# Altium PCB PCB1.PcbDoc
Units mm, origin at the board's own origin, x right, y up, seen from the top; angles counter-clockwise.
Board outline 45.85 x 46.69 mm, 6 copper layers (Top Layer 1, Layer 2, Layer 3, Layer 4, Layer 5, Bottom Layer 1), stack 0.816 mm thick; 33 components, 21 nets, 102 pads, 79 vias.
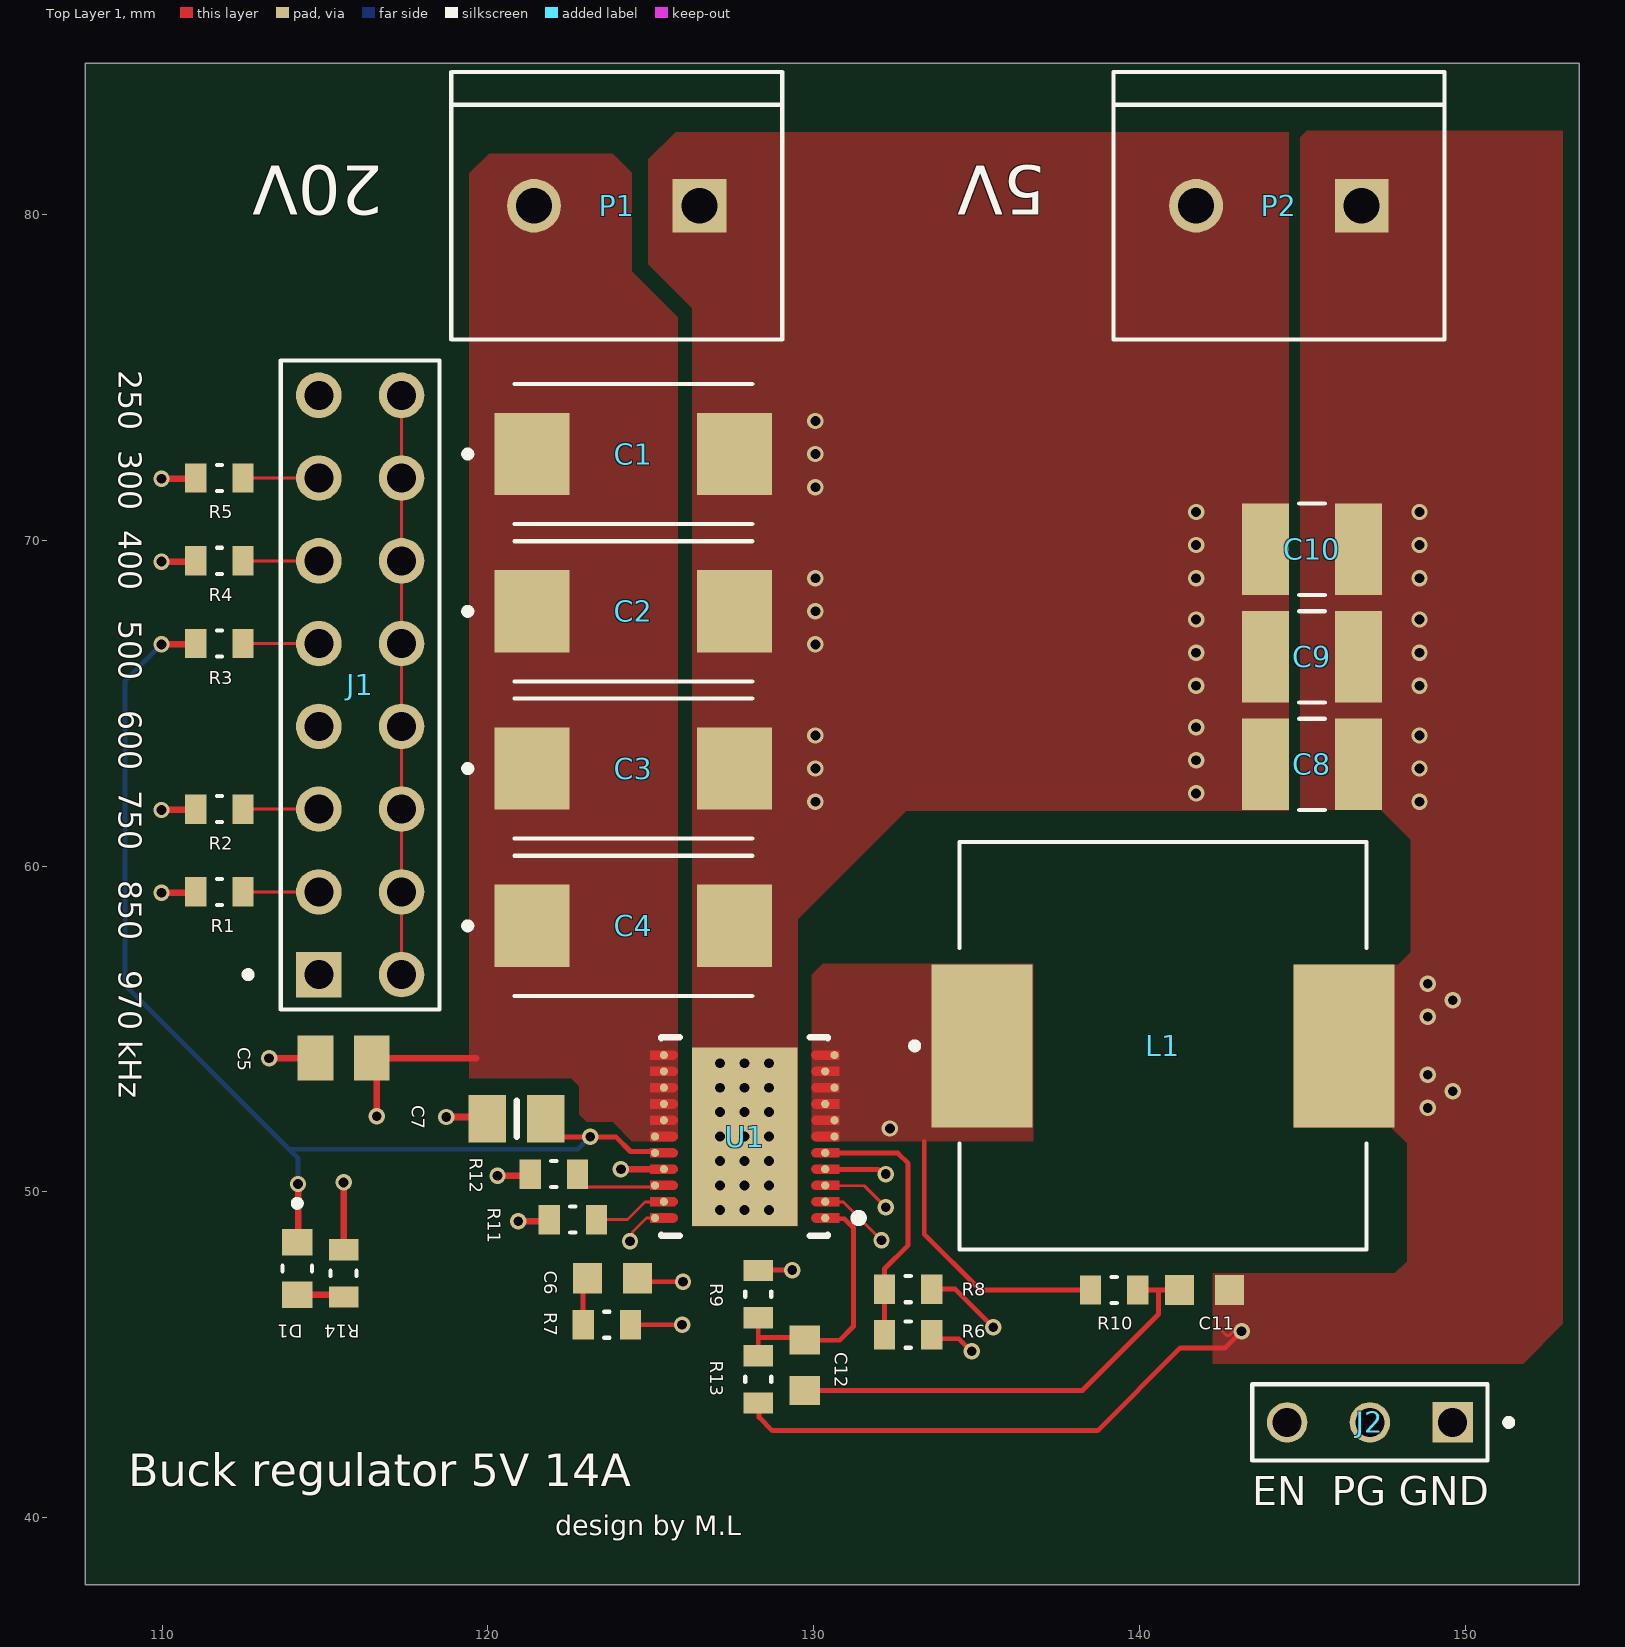
[diagram p0: Top Layer 1 view]
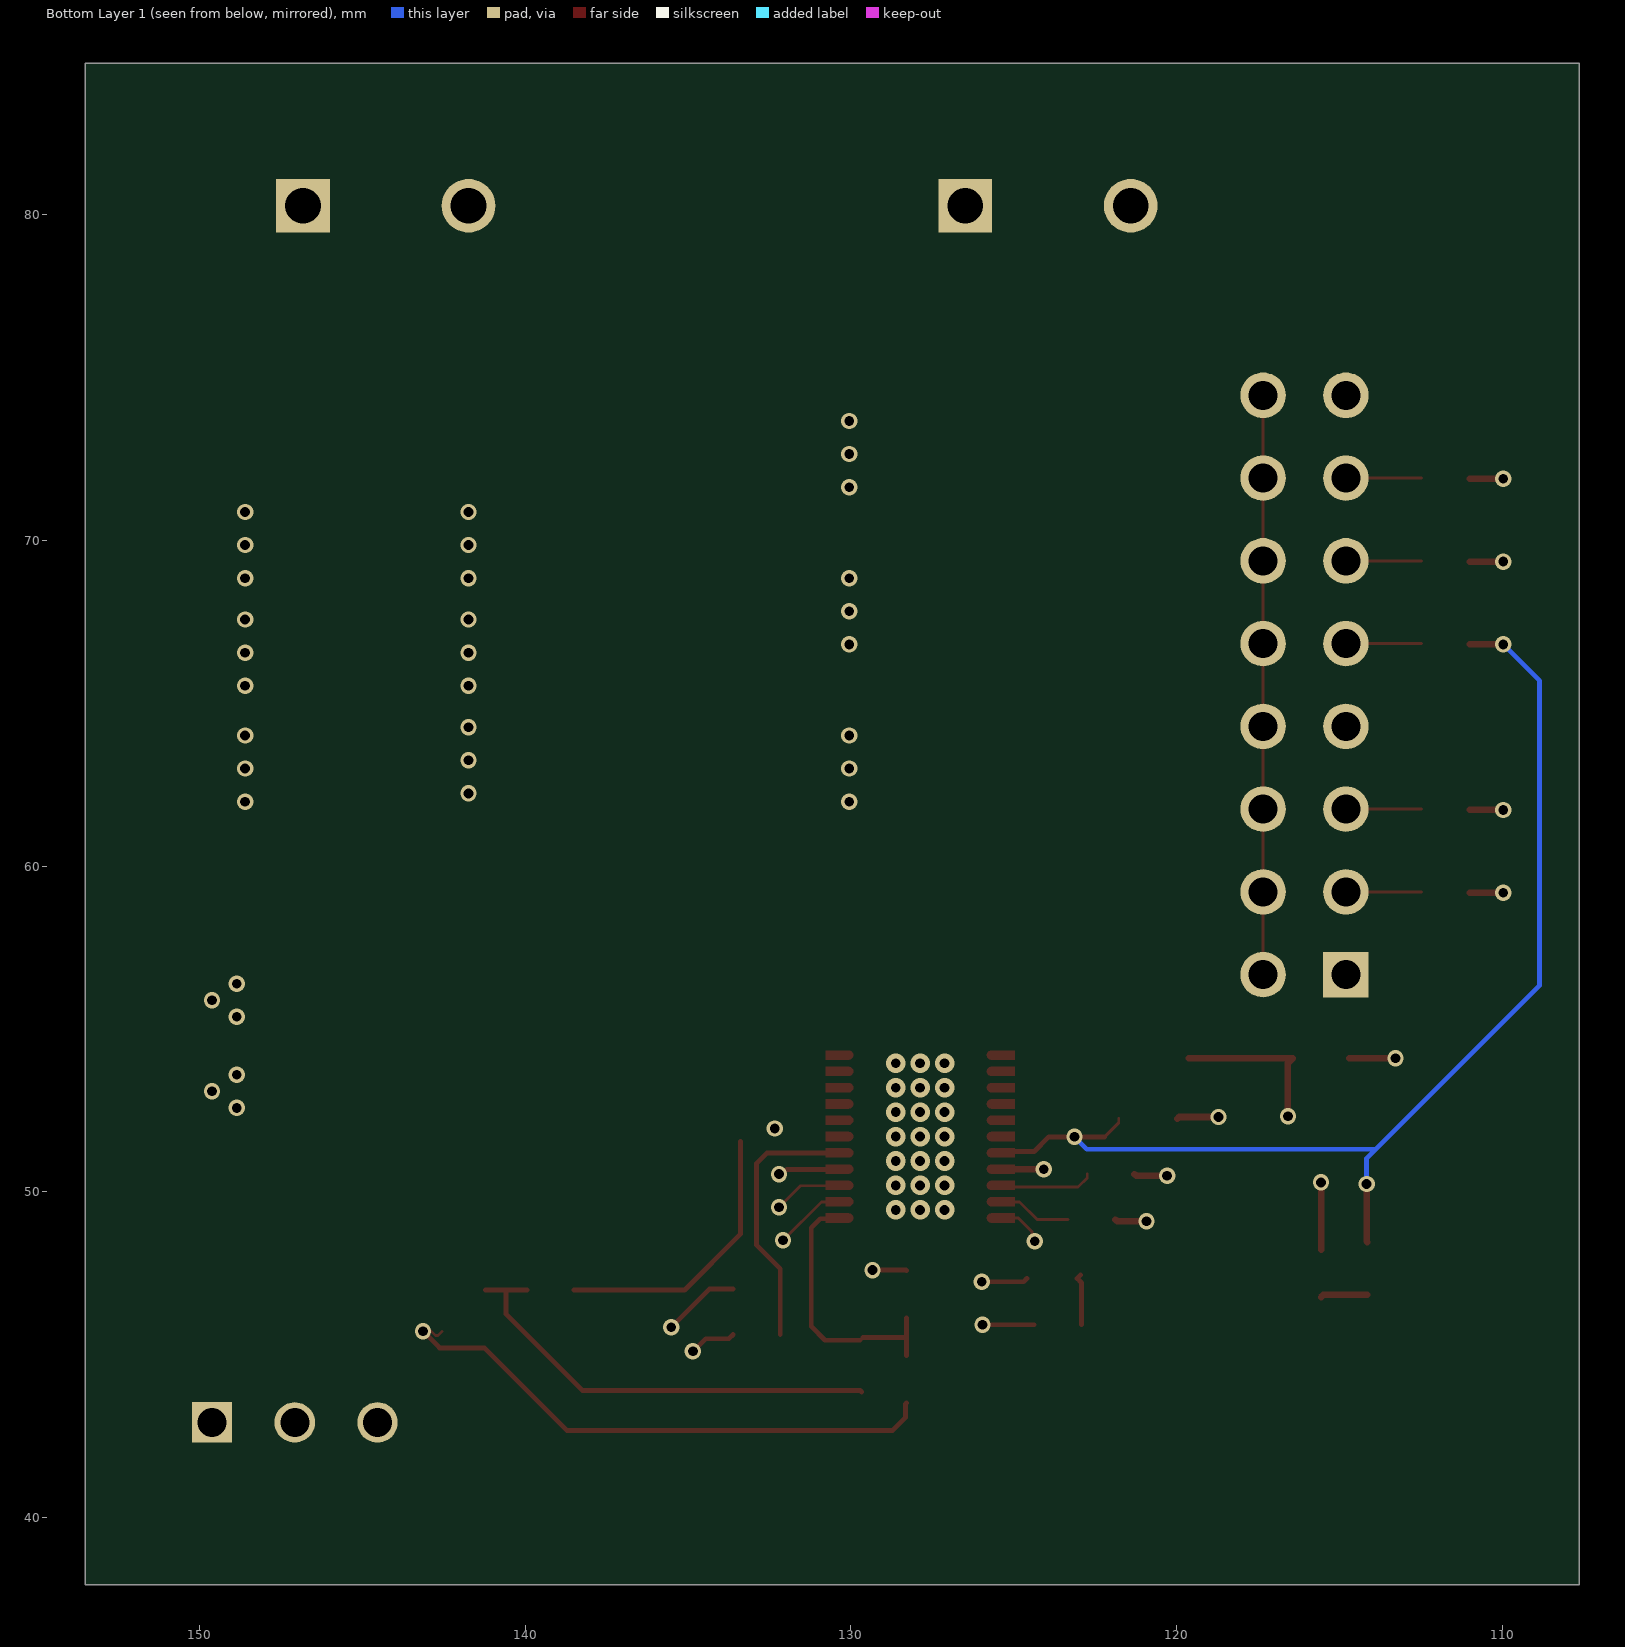
[diagram p1: Bottom Layer 1 view, seen from below]
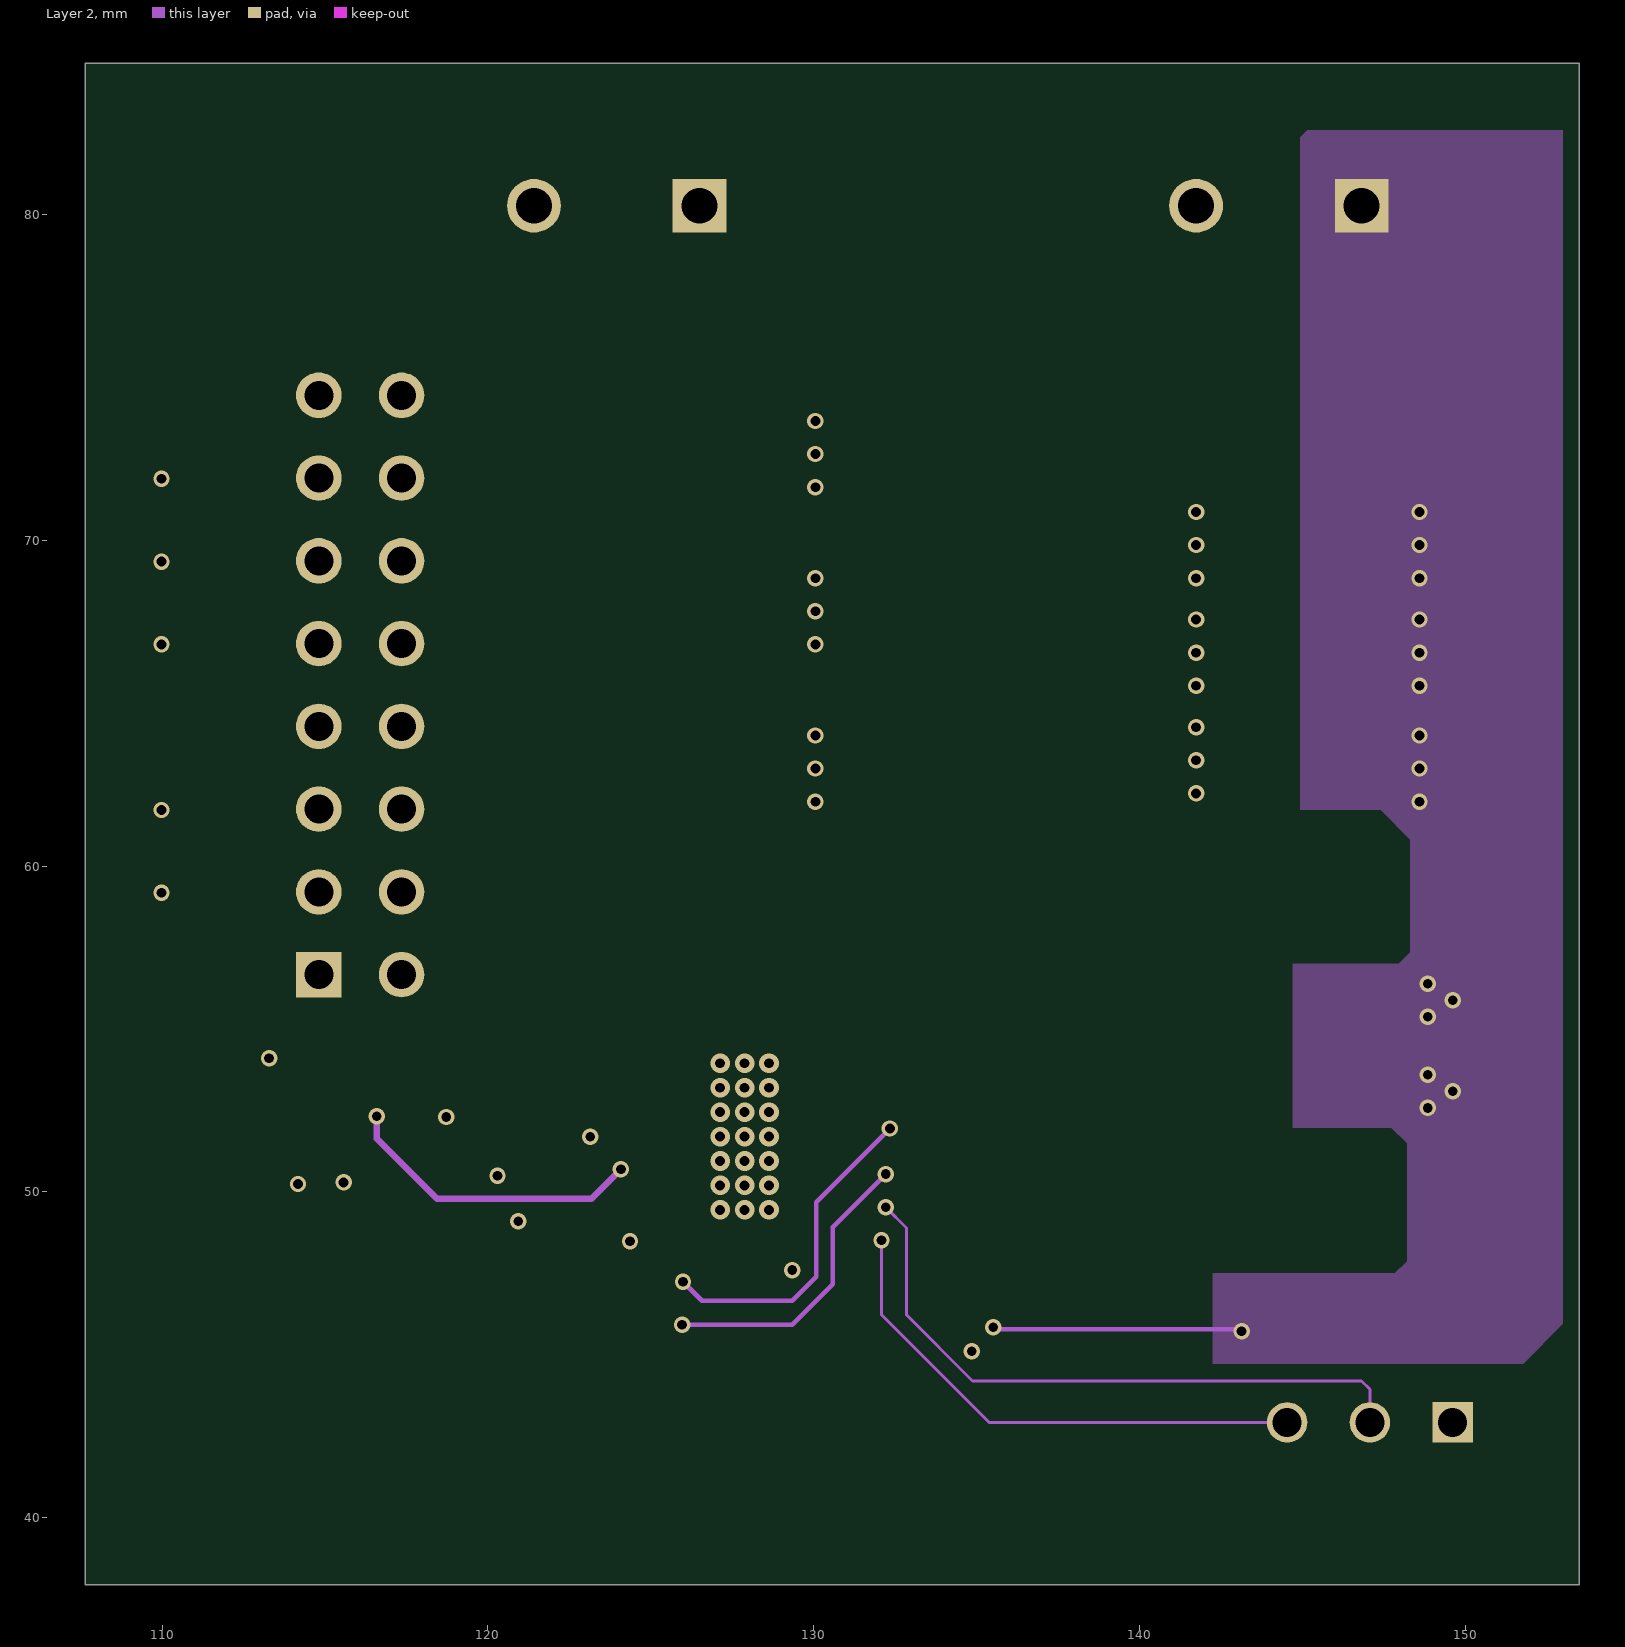
[diagram p2: Layer 2]
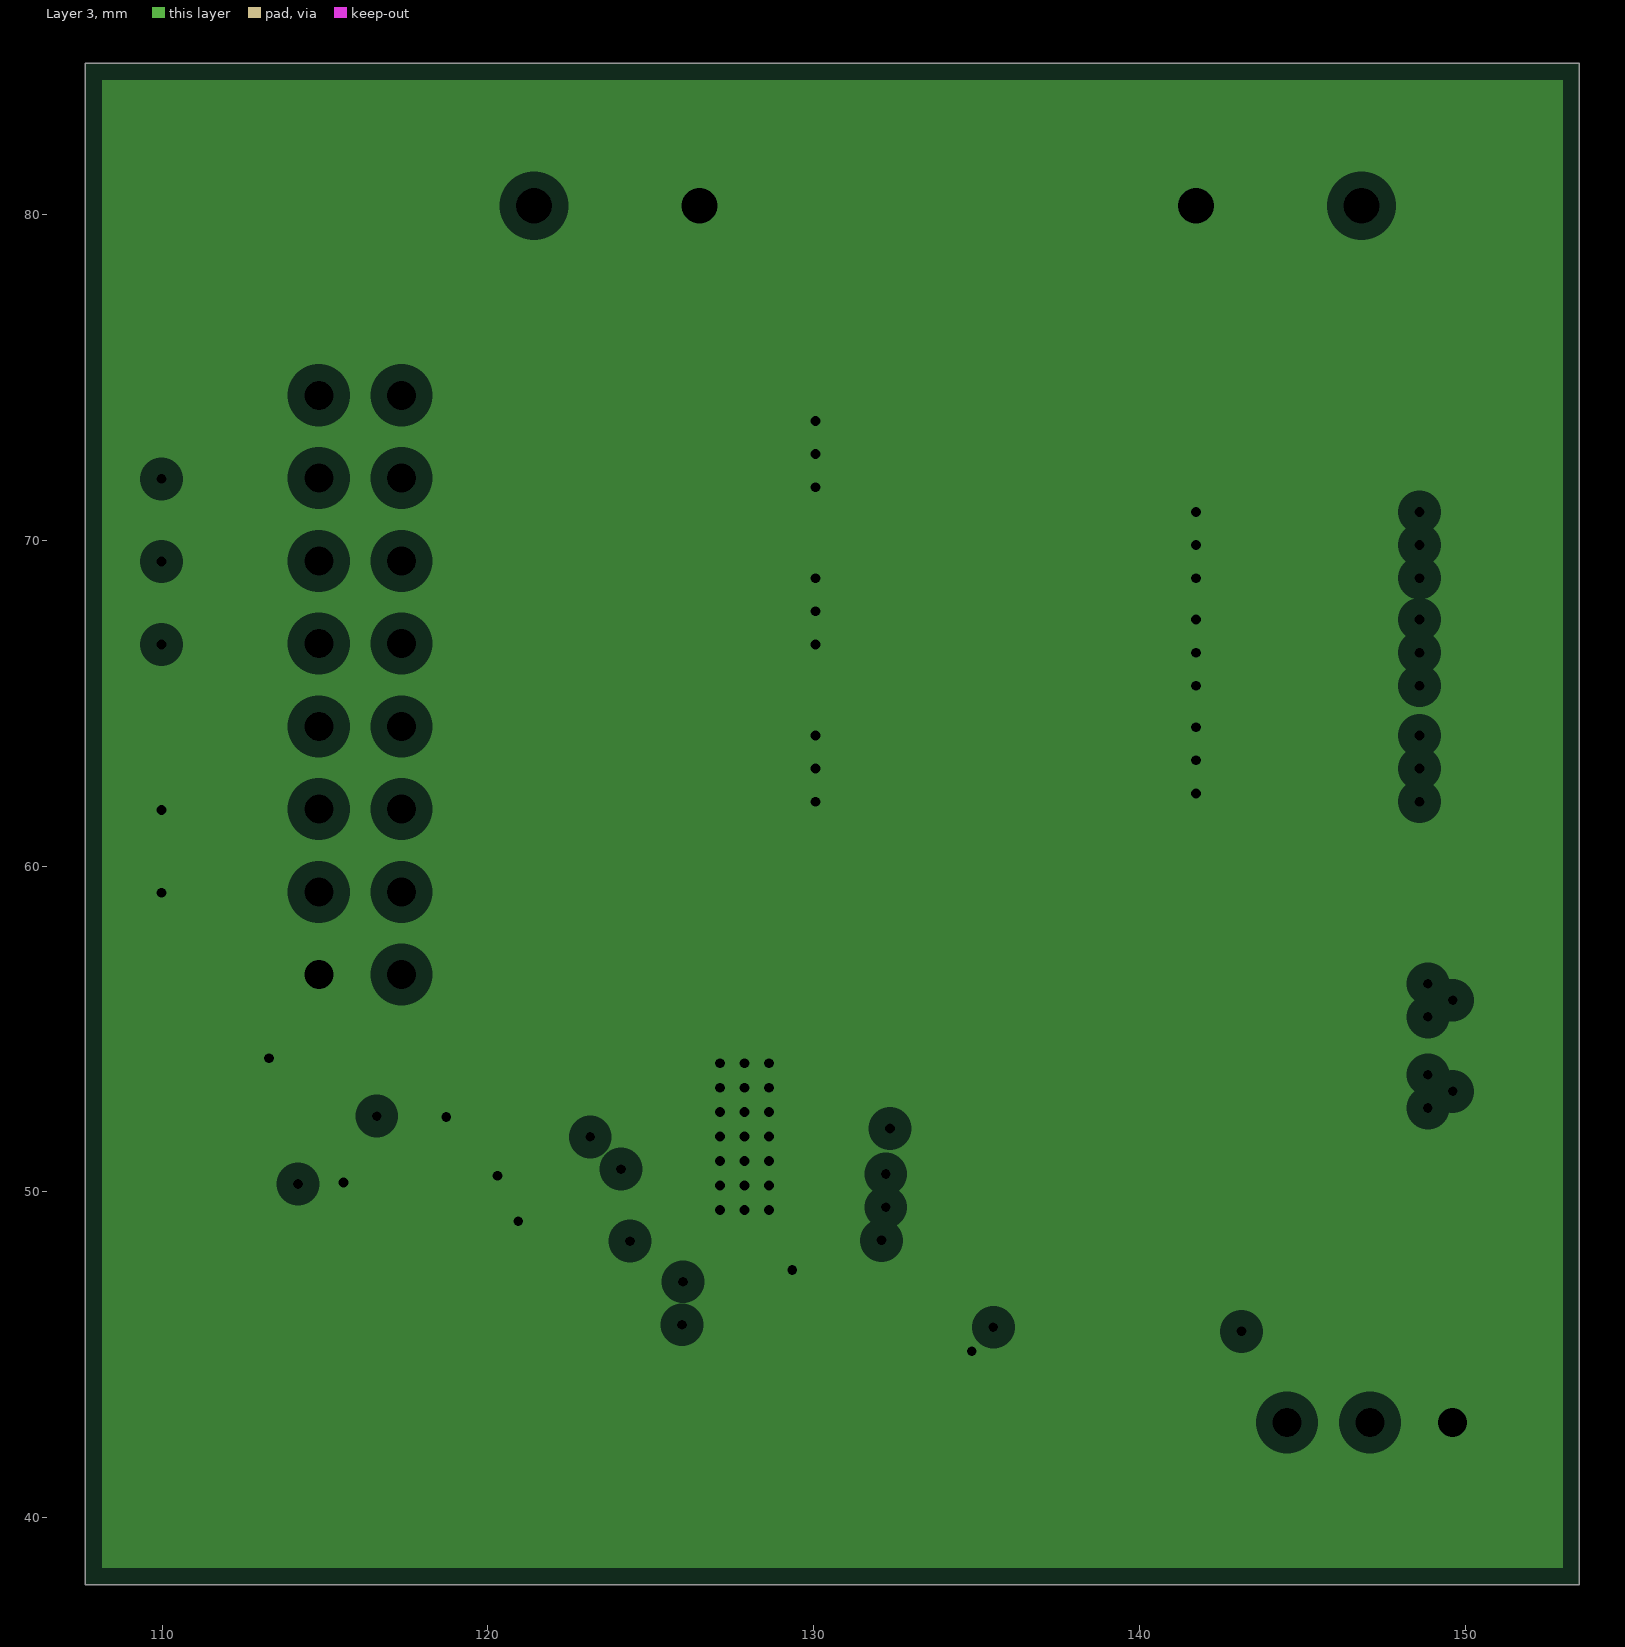
[diagram p3: Layer 3, clearances drawn from the general rule]
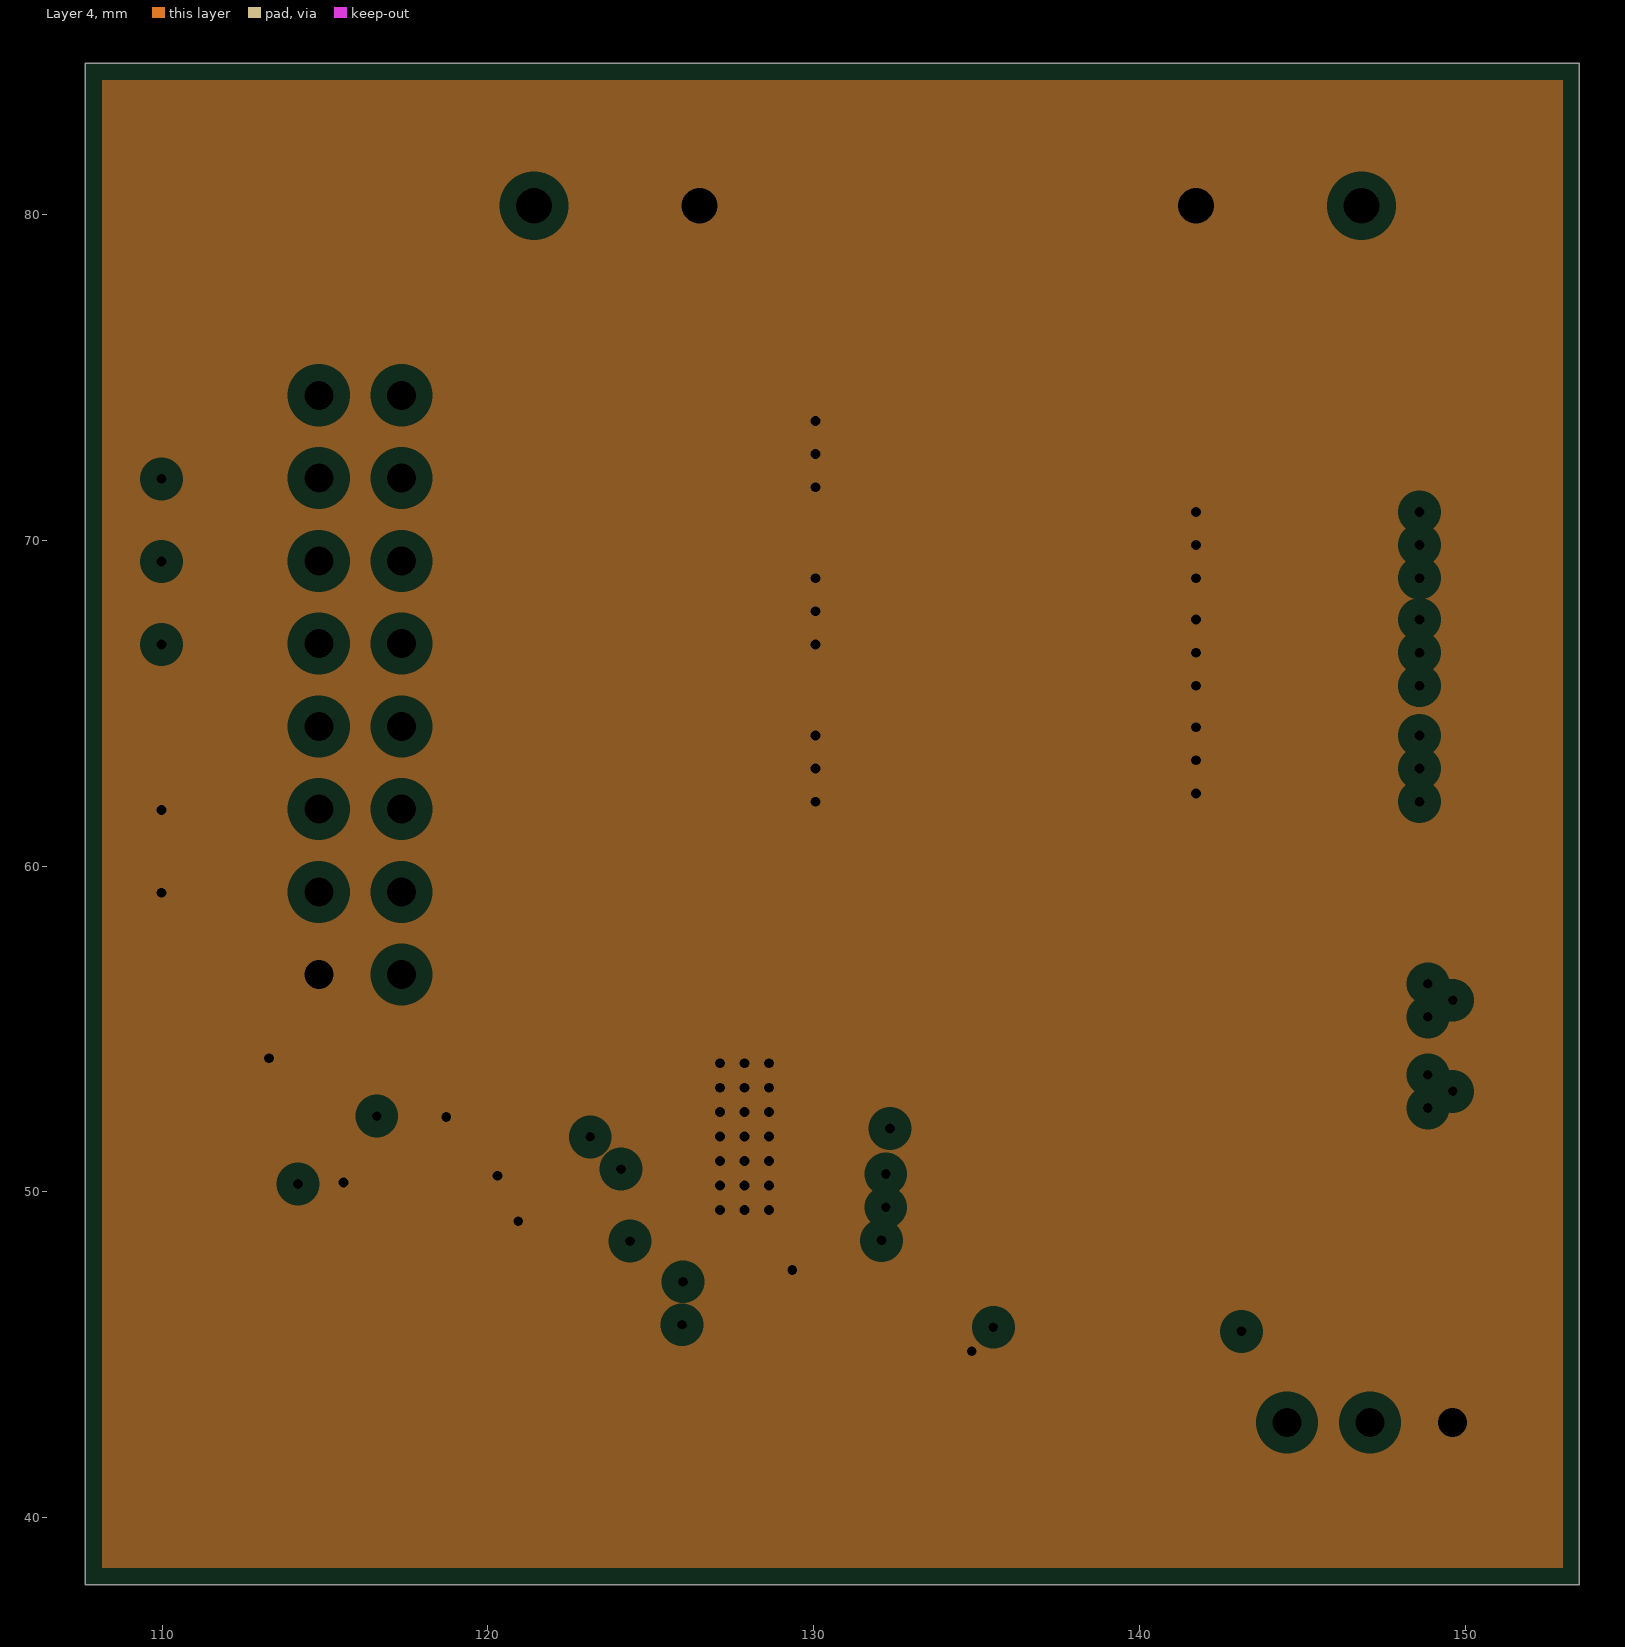
[diagram p4: Layer 4, clearances drawn from the general rule]
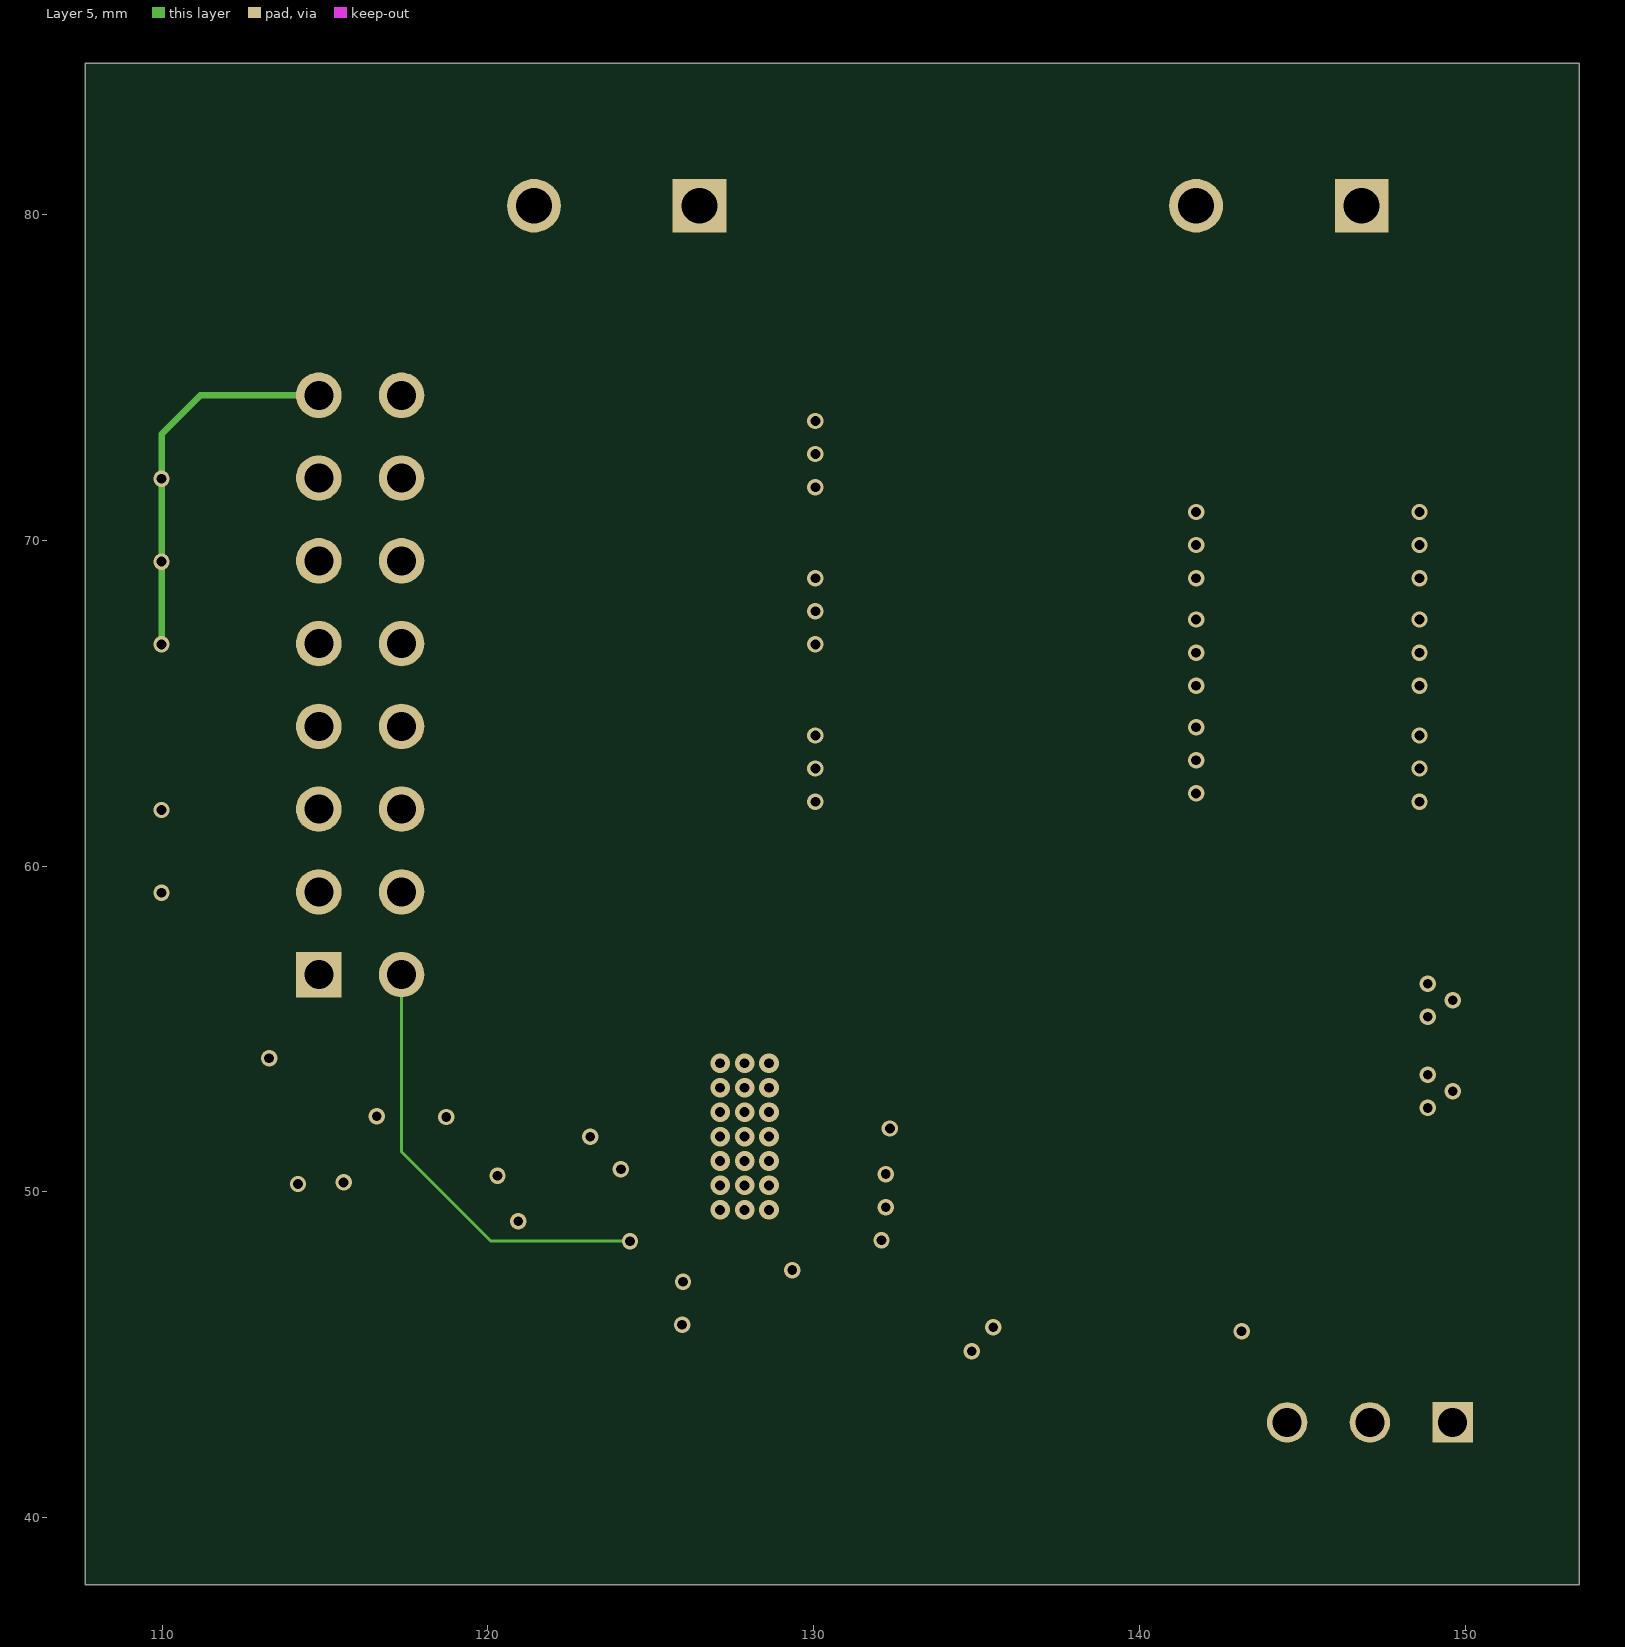
[diagram p5: Layer 5]
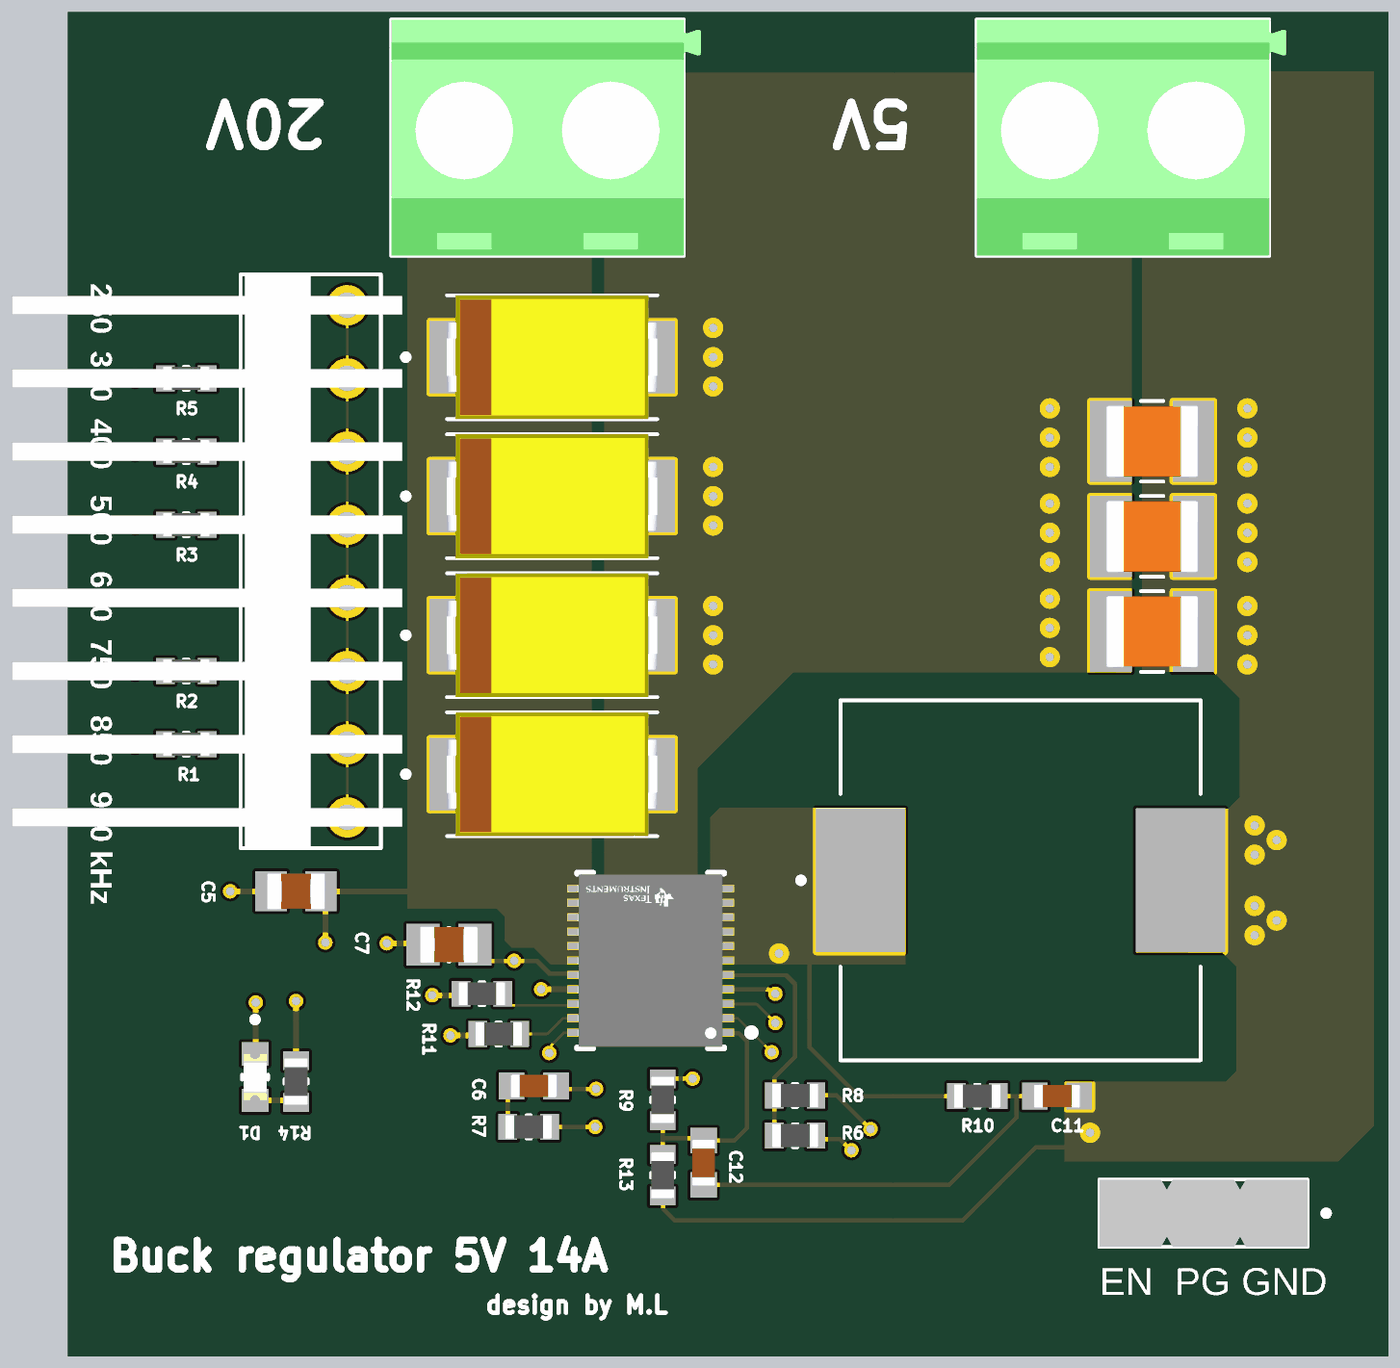
[diagram p6: 3D render of the assembled board from above, using the file's embedded part models]

## Layer stack, top to bottom
Top Solder: solder mask 0.0102, Solder Resist, Dk 3.5
Top Layer 1: signal copper 0.035
Dielectric 2: prepreg 0.0711, PP-006, Dk 4.1
Layer 2: signal copper 0.035
Dielectric 4: prepreg 0.0711, PP-006, Dk 4.1
Layer 3: plane copper 0.0356, net GND
Dielectric 1: dielectric 0.32, FR-4, Dk 4.8
Layer 4: plane copper 0.0356, net GND
Dielectric 5: prepreg 0.0711, PP-006, Dk 4.1
Layer 5: signal copper 0.035
Dielectric 3: prepreg 0.0711, PP-006, Dk 4.1
Bottom Layer 1: signal copper 0.035
Bottom Solder: solder mask 0.0102, Solder Resist, Dk 3.5

## Board outline
107.645,37.948 153.492,37.948 153.492,84.633 107.645,84.633

## Design rules (kind name [scope] priority, off if disabled: settings)
Clearance Clearance_2_1 [(ExistsOnLayer('Layer 2') Or ExistsOnLayer('Layer 5')) vs (ExistsOnLayer('Layer 2') Or ExistsOnLayer('Layer 5'))] p1: gap=0.1 ignorepadtopadclearanceinfootprint=FALSE sourcerule=36 cellrowname=All cellrowtype=0 cellcolname=All cellcoltype=0 innerlayers=TRUE
Clearance Clearance_2_2 [(ExistsOnLayer('Top Layer 1') Or ExistsOnLayer('Bottom Layer 1')) vs (ExistsOnLayer('Top Layer 1') Or ExistsOnLayer('Bottom Layer 1'))] p2: gap=0.1 ignorepadtopadclearanceinfootprint=FALSE sourcerule=36 cellrowname=All cellrowtype=0 cellcolname=All cellcoltype=0 outerlayers=TRUE
Clearance Clearance_2 [All] p3: gap=0.254 ignorepadtopadclearanceinfootprint=FALSE except(0: Arc-Hole Track-Hole SMDPad-Hole THPad-Hole Via-Hole Fill-Hole Poly-Hole Region-Hole Text-Hole Hole-Hole; 0.09: Arc-Arc Arc-Track Arc-Text Track-Track Track-Text Text-Text; 0.127: SMDPad-SMDPad; 0.33: Arc-THPad Track-THPad THPad-Text; 0.5: THPad-THPad) ismatrix=TRUE
PlaneClearance [All] p1: clearance=0.508
PlaneConnect [All] p1: planeconnectstyle=Direct reliefexpansion=0.508 reliefentries=4 reliefconductorwidth=0.254 reliefairgap=0.254
PolygonConnect [All] p1: connectstyle=Relief reliefconductorwidth=0.254 reliefentries=4 polygonreliefangle="90 Angle" airgapwidth=0.254
RoutingVias RoutingViaStyle_1 [All] p1: holewidth=0.3 width=0.4 viastyle="Through Hole" minholewidth=0.3 minwidth=0.4 maxholewidth=0.711 maxwidth=1.27
SolderMaskExpansion [All] p1: expansion=0.102 istentingtop=FALSE
Width MaxMinWidth_1 [All] p1: maxlimit=5 minlimit=0.09 preferedwidth=0.254 minimp=50.000000 maximp=50.000000 favimp=50.000000
28 further rules are at their usual default settings.

## Components (designator, comment, footprint, x,y, rotation, side; value= is the part's Value field where it differs from the comment)
C1 "TCJD226M035R0070" CAPPM7343X310N 124.46,72.644 r0 top
C2 "TCJD226M035R0070" CAPPM7343X310N 124.46,67.818 r0 top
C3 "TCJD226M035R0070" CAPPM7343X310N 124.46,62.992 r0 top
C4 "TCJD226M035R0070" CAPPM7343X310N 124.46,58.166 r0 top
C5 "CL21A475KLCLQNC" CAPC2012X135N 115.57,54.102 r0 top
C6 "CL10B104KB8NNNC" CAPC1608X90N 123.825,47.346 r180 top
C7 "CL21B105KBFNNNE" CAPC2012X140N 120.879,52.248 r0 top
C8 "CL32A107MPVNNNE" ANTC3225X280N 145.288,63.119 r180 top
C9 "CL32A107MPVNNNE" ANTC3225X280N 145.288,66.421 r180 top
C10 "CL32A107MPVNNNE" ANTC3225X280N 145.288,69.723 r180 top
C11 "CL10B104KB8NNNC" CAPC1608X90N 141.986,46.99 r180 top
C12 "CL10C102JB8NNNC" CAPC1608X90N 129.718,44.679 r90 top
D1 "LTST-C190GKT" LEDC1608X35N 114.148,47.65 r270 top
J1 "87227-8" TE_87227-8 116.078,65.557 r90 top
J2 "5-146285-3" TE_5-146285-3 149.606,42.926 r180 top
L1 "SRP1265A-2R2M" IND_SRP1265A-330M 140.716,54.483 r0 top
P1 "282837-2" TE_282837-2 123.952,80.264 r180 top
P2 "282837-2" TE_282837-2 144.272,80.264 r180 top
R1 "ERJ3EKF4750V" RES_ERJ3EKF4750V 111.76,59.207 r0 top
R2 "ERJ3EKF4750V" RES_ERJ3EKF4750V 111.76,61.747 r0 top
R3 "ERJ3EKF4750V" RES_ERJ3EKF4750V 111.76,66.827 r0 top
R4 "ERJ3EKF4750V" RES_ERJ3EKF4750V 111.76,69.367 r0 top
R5 "ERJ3EKF4750V" RES_ERJ3EKF4750V 111.76,71.907 r0 top
R6 "ERJ3EKF4750V" RES_ERJ3EKF4750V 132.893,45.618 r0 top
R7 "ERJ-3GEY0R00V" RES_ERJ-3GEY0R00V 123.647,45.923 r180 top
R8 "ERJ3EKF4750V" RES_ERJ3EKF4750V 132.893,47.015 r180 top
R9 "ERJ3EKF4750V" RES_ERJ3EKF4750V 128.295,46.863 r90 top
R10 "ERJ-3GEY0R00V" RES_ERJ-3GEY0R00V 139.217,46.99 r0 top
R11 "ERJ3EKF4750V" RES_ERJ3EKF4750V 122.606,49.149 r180 top
R12 "ERJ3EKF4750V" RES_ERJ3EKF4750V 122.022,50.546 r0 top
R13 "ERJ3EKF4750V" RES_ERJ3EKF4750V 128.295,44.247 r270 top
R14 "ERJ3EKF4750V" RES_ERJ3EKF4750V 115.57,47.498 r270 top
U1 "TPS53319DQPR" FP-DQP0022A-MFG 127.875,51.698 r180 top

## Footprints (in the part's own frame and the unit in brackets; to place one, negate y for a bottom-side part, rotate by r counter-clockwise, add the part's x,y. Pads: shape width x height; smd on the part's side, far side on the other; paste and mask are expansions set on the pad)
ANTC3225X280N [mm]
  rect 1.45x2.81 smd: 1(-1.43,0) 2(1.43,0)
  silkscreen extent -0.39,-1.4 0.39,1.4, body extent -1.6,-1.25 1.6,1.25, height 2.8
CAPC1608X90N [mm]
  rect 0.89x0.93 smd: 1(-0.77,0) 2(0.77,0)
  body extent -0.8,-0.4 0.8,0.4, height 0.45
CAPC2012X135N [mm]
  rect 1.1x1.38 smd: 1(-0.863,0) 2(0.863,0)
  body extent -1,-0.63 1,0.63, height 1.35
CAPC2012X140N [mm]
  rect 1.15x1.45 smd: 1(-0.9,0) 2(0.9,0)
  silkscreen extent 0,-0.55 0,0.55, body extent -1,-0.63 1,0.63, height 1.35
CAPPM7343X310N [mm]
  rect 2.3x2.52 smd: 1(-3.11,0) 2(3.11,0)
  silkscreen extent -5.18,-2.15 3.65,2.15, body extent -3.65,-2.15 3.65,2.15, height 3.1
FP-DQP0022A-MFG [mm]
  round 0.252 smd paste-1000 mask+0: 1(-2.475,2.5) 2(-2.475,2) 3(-2.475,1.5) 4(-2.475,1) 5(-2.475,0.5) 6(-2.76,0) 7(-2.76,-0.5) 8(-2.475,-1) 9(-2.76,-1.5) 10(-2.475,-2) 11(-2.76,-2.5) 12(2.475,-2.5) 13(2.475,-2) 14(2.475,-1.5) 15(2.475,-1) 16(2.475,-0.5) 17(2.75,0) 18(2.75,0.5) 19(2.475,1) 20(2.75,1.5) 21(2.475,2) 22(2.75,2.5)
  rect 3.24x5.48 smd paste-1000 mask+0: 23(0,0)
  Top Layer 1 region: 2.9,2.36 2.19,2.36 2.136,2.371 2.091,2.401 2.061,2.446 2.05,2.5 2.05,2.5 2.061,2.554 2.091,2.599 2.136,2.629 2.19,2.64 2.19,2.64 2.9,2.64
  Top Layer 1 region: 2.9,1.86 2.19,1.86 2.136,1.871 2.091,1.901 2.061,1.946 2.05,2 2.05,2 2.061,2.054 2.091,2.099 2.136,2.129 2.19,2.14 2.19,2.14 2.9,2.14
  Top Layer 1 region: 2.9,1.36 2.19,1.36 2.136,1.371 2.091,1.401 2.061,1.446 2.05,1.5 2.05,1.5 2.061,1.554 2.091,1.599 2.136,1.629 2.19,1.64 2.19,1.64 2.9,1.64
  Top Layer 1 region: 2.9,0.86 2.19,0.86 2.136,0.871 2.091,0.901 2.061,0.946 2.05,1 2.05,1 2.061,1.054 2.091,1.099 2.136,1.129 2.19,1.14 2.19,1.14 2.9,1.14
  Top Layer 1 region: 2.9,0.36 2.19,0.36 2.136,0.371 2.091,0.401 2.061,0.446 2.05,0.5 2.05,0.5 2.061,0.554 2.091,0.599 2.136,0.629 2.19,0.64 2.19,0.64 2.9,0.64
  Top Layer 1 region: 2.9,-0.14 2.19,-0.14 2.136,-0.129 2.091,-0.099 2.061,-0.054 2.05,0 2.05,0 2.061,0.054 2.091,0.099 2.136,0.129 2.19,0.14 2.19,0.14 2.9,0.14
  Top Layer 1 region: 2.9,-0.64 2.19,-0.64 2.136,-0.629 2.091,-0.599 2.061,-0.554 2.05,-0.5 2.05,-0.5 2.061,-0.446 2.091,-0.401 2.136,-0.371 2.19,-0.36 2.19,-0.36 2.9,-0.36
  Top Layer 1 region: 2.9,-1.14 2.19,-1.14 2.136,-1.129 2.091,-1.099 2.061,-1.054 2.05,-1 2.05,-1 2.061,-0.946 2.091,-0.901 2.136,-0.871 2.19,-0.86 2.19,-0.86 2.9,-0.86
  Top Layer 1 region: 2.9,-1.64 2.19,-1.64 2.136,-1.629 2.091,-1.599 2.061,-1.554 2.05,-1.5 2.05,-1.5 2.061,-1.446 2.091,-1.401 2.136,-1.371 2.19,-1.36 2.19,-1.36 2.9,-1.36
  Top Layer 1 region: 2.9,-2.14 2.19,-2.14 2.136,-2.129 2.091,-2.099 2.061,-2.054 2.05,-2 2.05,-2 2.061,-1.946 2.091,-1.901 2.136,-1.871 2.19,-1.86 2.19,-1.86 2.9,-1.86
  Top Layer 1 region: 2.9,-2.64 2.19,-2.64 2.136,-2.629 2.091,-2.599 2.061,-2.554 2.05,-2.5 2.05,-2.5 2.061,-2.446 2.091,-2.401 2.136,-2.371 2.19,-2.36 2.19,-2.36 2.9,-2.36
  Top Layer 1 region: -2.9,-2.36 -2.19,-2.36 -2.136,-2.371 -2.091,-2.401 -2.061,-2.446 -2.05,-2.5 -2.05,-2.5 -2.061,-2.554 -2.091,-2.599 -2.136,-2.629 -2.19,-2.64 -2.19,-2.64 -2.9,-2.64
  Top Layer 1 region: -2.9,-1.86 -2.19,-1.86 -2.136,-1.871 -2.091,-1.901 -2.061,-1.946 -2.05,-2 -2.05,-2 -2.061,-2.054 -2.091,-2.099 -2.136,-2.129 -2.19,-2.14 -2.19,-2.14 -2.9,-2.14
  Top Layer 1 region: -2.9,-1.36 -2.19,-1.36 -2.136,-1.371 -2.091,-1.401 -2.061,-1.446 -2.05,-1.5 -2.05,-1.5 -2.061,-1.554 -2.091,-1.599 -2.136,-1.629 -2.19,-1.64 -2.19,-1.64 -2.9,-1.64
  Top Layer 1 region: -2.9,-0.86 -2.19,-0.86 -2.136,-0.871 -2.091,-0.901 -2.061,-0.946 -2.05,-1 -2.05,-1 -2.061,-1.054 -2.091,-1.099 -2.136,-1.129 -2.19,-1.14 -2.19,-1.14 -2.9,-1.14
  Top Layer 1 region: -2.9,-0.36 -2.19,-0.36 -2.136,-0.371 -2.091,-0.401 -2.061,-0.446 -2.05,-0.5 -2.05,-0.5 -2.061,-0.554 -2.091,-0.599 -2.136,-0.629 -2.19,-0.64 -2.19,-0.64 -2.9,-0.64
  Top Layer 1 region: -2.9,0.14 -2.19,0.14 -2.136,0.129 -2.091,0.099 -2.061,0.054 -2.05,0 -2.05,0 -2.061,-0.054 -2.091,-0.099 -2.136,-0.129 -2.19,-0.14 -2.19,-0.14 -2.9,-0.14
  Top Layer 1 region: -2.9,0.64 -2.19,0.64 -2.136,0.629 -2.091,0.599 -2.061,0.554 -2.05,0.5 -2.05,0.5 -2.061,0.446 -2.091,0.401 -2.136,0.371 -2.19,0.36 -2.19,0.36 -2.9,0.36
  Top Layer 1 region: -2.9,1.14 -2.19,1.14 -2.136,1.129 -2.091,1.099 -2.061,1.054 -2.05,1 -2.05,1 -2.061,0.946 -2.091,0.901 -2.136,0.871 -2.19,0.86 -2.19,0.86 -2.9,0.86
  Top Layer 1 region: -2.9,1.64 -2.19,1.64 -2.136,1.629 -2.091,1.599 -2.061,1.554 -2.05,1.5 -2.05,1.5 -2.061,1.446 -2.091,1.401 -2.136,1.371 -2.19,1.36 -2.19,1.36 -2.9,1.36
  Top Layer 1 region: -2.9,2.14 -2.19,2.14 -2.136,2.129 -2.091,2.099 -2.061,2.054 -2.05,2 -2.05,2 -2.061,1.946 -2.091,1.901 -2.136,1.871 -2.19,1.86 -2.19,1.86 -2.9,1.86
  Top Layer 1 region: -2.9,2.64 -2.19,2.64 -2.136,2.629 -2.091,2.599 -2.061,2.554 -2.05,2.5 -2.05,2.5 -2.061,2.446 -2.091,2.401 -2.136,2.371 -2.19,2.36 -2.19,2.36 -2.9,2.36
  silkscreen extent -3.63,-3.05 2.55,3.05, body extent -3,-3.15 3,3.15, height 0.25
IND_SRP1265A-330M [mm]
  rect 3.1x5 smd: 1(-5.55,0) 2(5.55,0)
  silkscreen extent -7.72,-6.25 6.25,6.25
LEDC1608X35N [mm]
  rect 0.81x0.93 smd: A(0.81,0) C(-0.81,0)
  silkscreen extent -2.1,-0.45 0.09,0.45, body extent -0.8,-0.4 0.8,0.4, height 0.8
RES_ERJ3EKF4750V [mm]
  rect 0.65x0.9 smd: 1(-0.725,0) 2(0.725,0)
  silkscreen extent -0.08,-0.4 0.08,0.4, body extent -0.8,-0.4 0.8,0.4, height 0.45
RES_ERJ-3GEY0R00V [mm]
  rect 0.65x0.9 smd: 1(-0.725,0) 2(0.725,0)
  silkscreen extent -0.08,-0.4 0.08,0.4, body extent -0.8,-0.4 0.8,0.4, height 0.45
TE_5-146285-3 [mm]
  rect 1.24x1.24 hole 0.89: 1(0,0)
  round 1.24 hole 0.89: 2(2.54,0) 3(5.08,0)
  silkscreen extent -1.82,-1.17 6.15,1.17, body extent -1.07,-1.17 6.15,1.17, height 8.32
TE_87227-8 [mil]
  rect 55x55 hole 35: 1(-350,50)
  round 55 hole 35: 2(-250,50) 3(-150,50) 4(-50,50) 5(50,50) 6(150,50) 7(250,50) 8(350,50) 9(-350,-50) 10(-250,-50) 11(-150,-50) 12(-50,-50) 13(50,-50) 14(150,-50) 15(250,-50) 16(350,-50)
  silkscreen extent -392,-96 392,139, body extent -392,-96 392,96, height 408
TE_282837-2 [mm]
  rect 1.65x1.65 hole 1.1: 1(-2.54,0)
  round 1.65 hole 1.1: 2(2.54,0)
  silkscreen extent -5.08,-4.1 5.08,4.1, body extent -5.68,-4.1 5.08,4.1, height 10

## Part data
C1 C2 C3 C4: library part TPSD107M016S0100, "CAP TANT POLY 22UF 35V 2917", Package=None, Availability=Unavailable, MF="{'manufacturer': u'AVX'}", MP=TPSD107M016S0100, Price=None
C5: "MLCC 0805 X5R 4.7uF Â±10% 35V T:0.85mm", Package=None, Availability=Unavailable, MF="{'manufacturer': u'Samsung'}", MP=CL21A475KLCLQNC, Price=None
C6 C11 J1 J2 R1 R2 R3 R4 R5 R6 R8 R9 R11 R12 R13 R14: Package=None, Availability=Unavailable, Price=None
  C6 C11: MF="{'manufacturer': u'Samsung Electro-Mechanics'}", MP=CL10B104KB8NNNC
  J1: MF="{'manufacturer': u'TE Connectivity'}", MP=87227-8
  J2: MF="{'manufacturer': u'TE Connectivity'}", MP=5-146285-3
  R1 R2 R3 R4 R5 R6 R8 R9 R11 R12 R13 R14: MF="{'manufacturer': u'Panasonic'}", MP=ERJ3EKF4750V
C7: "Capacitor: ceramic; MLCC; 1uF; 50V; X7R; Â±10%; SMD; 0805", Package=None, Availability=Unavailable, MF="{'manufacturer': u'Samsung Electro-Mechanics'}", MP=CL21B105KBFNNNE, Price=None
C8 C9 C10: "Cap Ceramic 100uF 10V X5R 20% SMD 1210 85Â°C Embossed T/R", Package=None, Availability=Unavailable, MF="{'manufacturer': u'Samsung Electro-Mechanics'}", MP=CL32A107MPVNNNE, Price=None
C12: library part CL10B104KB8NNNC, "CAP CER 1000PF 50V C0G/NP0 0603", Package=None, Availability=Unavailable, MF="{'manufacturer': u'Samsung Electro-Mechanics'}", MP=CL10B104KB8NNNC, Price=None
D1: "LED; SMD; 0603; Green; 18-180mcd; 1.6x0.8x0.8mm; 130Â°; 1.6Ã·2.4V; 20mA <a href=\"https://pricing.snapeda.com/parts/LTST-C190GKT/Lite-On%20Inc./view-part?ref=eda\">Check availability</a>", Package=None, Availability=Unavailable, MF="{'manufacturer': u'Lite-On Inc.'}", MP=LTST-C190GKT, Price=None
L1: library part SRP1265A-330M, "Inductor Power Shielded Wirewound 33uH 20% 100KHz Carbonyl Powder 8A 58mOhm DCR Automotive T/R", Package=None, Availability=Unavailable, MF="{'manufacturer': u'Bourns'}", MP=SRP1265A-330M, Price=None
P1 P2: "TERM BLOCK 5.08MM 2POS SIDE ENTY", Package=None, Availability=Unavailable, MF="{'manufacturer': u'TE Connectivity'}", MP=282837-2, Price=None
R7 R10: "<a href=\"https://pricing.snapeda.com/parts/ERJ-3GEY0R00V/Panasonic/view-part?ref=eda\">Check availability</a>", Package=None, Availability=Unavailable, MF="{'manufacturer': u'Panasonic'}", MP=ERJ-3GEY0R00V, Price=None
U1: library part CMP-04918-000329-1, "IC REG BUCK ADJUSTABLE 14A 22SON", Case/Package=SON, Max Input Voltage=22V, Max Operating Temperature=85°C, Max Output Current=14A, Max Output Voltage=5.5V, Min Input Voltage=1.5V, Min Operating Temperature=-40°C, Min Output Voltage=600mV, Package Quantity=2500, Quiescent Current=320uA, Switching Frequency=1MHz, Contact Plating=Gold, Efficiency=91%, Lead Free="Contains Lead", Mount="Surface Mount", Number of Outputs=1, Number of Pins=22, Output Configuration=Positive, Output Current=14A, Output Type=Adjustable, Output Voltage=5.5V, Packaging="Tape and Reel", Radiation Hardening=No, RoHS Compliant=Yes, Series="D-CAP™, Eco-Mode™", Synchronous Rectifier=Yes

## Via types
v1: diameter 0.5, hole 0.3, Top Layer 1 to Bottom Layer 1, 58 vias
v2: diameter 0.6, hole 0.3, Top Layer 1 to Bottom Layer 1, 21 vias

## Nets (pads, with @x,y where several pads share a name; then routed paths per layer and width w, separated by ;. In a path a pad name is that pad's centre, name@x,y a point inside that pad or via, vN(x,y) a via of type N, cw(c..) or ccw(c..) an arc to the next point about the centre after c; other vN are vias at no path point)
ENABLE: J2.3 U1.2 | length 18.3
  Top Layer 1 w0.09: U1.2@130.364,49.689 130.905,49.689 v1(132.08,48.514)
  Layer 2 w0.09: v1(132.08,48.514) 132.08,46.228 135.382,42.926 J2.3
FREQ_SEL: J1.9 J1.10 J1.11 J1.12 J1.13 J1.14 J1.15 J1.16 U1.22 | length 32.5
  Top Layer 1 w0.09: J1.9 J1.10 J1.11 J1.12 J1.13 J1.14 J1.15 J1.16 ; v1(124.358,48.489) 124.437,48.567 124.437,48.77 124.864,49.197 125.124,49.197 U1.22
  Layer 5 w0.09: J1.9 117.348,51.232 120.091,48.489 v1(124.358,48.489)
GND: C1.2 C2.2 C3.2 C4.2 C5.1 C7.1 C8.2 C9.2 C10.2 J1.1 J2.1 P1.1 P2.2 R1.1 R2.1 R6.2 R9.2 R11.2 R12.1 R14.1 U1.23 | length 11.4
  Top Layer 1 w0.09: R1.1@111.01,59.182 R1.1 ; R2.1@111.01,61.722 R2.1
  Top Layer 1 w0.15: R9.2 128.307,47.6 v1(129.337,47.6) ; R6.2 133.743,45.493 134.454,45.493 134.837,45.11 v1(134.849,45.11)
  Top Layer 1 w0.2: v1(109.982,59.182) R1.1@111.01,59.182 ; v1(109.982,61.722) R2.1@111.01,61.722 ; v1(113.284,54.102) C5.1 ; R14.1 v1(115.57,50.292) ; v1(118.72,52.299) 119.928,52.299 C7.1 ; v1(120.294,50.495) 121.246,50.495 R12.1 ; v1(120.929,49.098) 121.83,49.098 R11.2
  other v1: 130.048,61.976 141.732,62.23 130.048,62.992 141.732,63.246 130.048,64.008 141.732,64.262 141.732,65.532 141.732,66.548 130.048,66.802 141.732,67.564 130.048,67.818 130.048,68.834 141.732,68.834 141.732,69.85 141.732,70.866 130.048,71.628 130.048,72.644 130.048,73.66
  other v2: 127.125,49.448 127.875,49.448 128.625,49.448 127.125,50.198 127.875,50.198 128.625,50.198 127.125,50.948 127.875,50.948 128.625,50.948 127.125,51.698 127.875,51.698 128.625,51.698 127.125,52.448 127.875,52.448 128.625,52.448 127.125,53.198 127.875,53.198 128.625,53.198 127.125,53.948 127.875,53.948 128.625,53.948
NetC6_1: C6.1 L1.1 R10.1 U1.6 U1.7 U1.8 U1.9 U1.10 U1.11 | length 20.2
  Top Layer 1 w0.15: C6.1 124.697,47.244 v1(125.984,47.244) ; 133.39,51.549 133.39,48.703 135.103,46.99 R10.1
  Layer 2 w0.15: v1(125.984,47.244) 126.568,46.66 129.337,46.66 130.073,47.396 130.073,49.682 v1(132.334,51.943)
NetC6_2: C6.2 R7.2 | length 1.6
  Top Layer 1 w0.15: R7.2 122.922,47.213 C6.2 C6.2@122.948,47.453
NetC11_2: C11.2 C12.1 R10.2 | length 13.9
  Top Layer 1 w0.15: C12.1@129.667,43.858 C12.1 138.244,43.909 140.579,46.244 140.579,46.99 ; R10.2 140.579,46.99 ; C11.2 140.579,46.99
NetC12_2: C12.2 R9.1 R13.1 U1.1 | length 8.3
  Top Layer 1 w0.09: C12.2@129.635,45.531 C12.2 ; U1.1@130.364,49.189 U1.1@130.379,49.174
  Top Layer 1 w0.15: R13.1 128.295,45.531 ; R9.1 128.295,45.531 ; C12.2@129.635,45.531 128.295,45.531 ; C12.2 130.793,45.449 131.216,45.872 131.216,48.895 130.937,49.174 U1.1@130.379,49.174
NetD1_A: D1.A R14.2 | length 1.5
  Top Layer 1 w0.2: D1.A 115.503,46.84 R14.2
NetJ1_2: J1.2 R1.2 | length 2.3
  Top Layer 1 w0.09: R1.2 J1.2
NetJ1_3: J1.3 R2.2 | length 2.3
  Top Layer 1 w0.09: R2.2 J1.3
NetJ1_5: J1.5 R3.2 | length 2.3
  Top Layer 1 w0.09: R3.2 J1.5
NetJ1_6: J1.6 R4.2 | length 2.3
  Top Layer 1 w0.09: R4.2 J1.6
NetJ1_7: J1.7 R5.2 | length 2.3
  Top Layer 1 w0.09: R5.2 J1.7
NetR6_1: R6.1 R8.2 U1.5 | length 8.2
  Top Layer 1 w0.15: U1.5@130.364,51.189 132.58,51.189 132.893,50.876 132.893,48.362 132.168,47.637 R6.1
NetR7_1: R7.1 U1.4 | length 12.7
  Top Layer 1 w0.15: R7.1 v1(125.959,45.923) ; U1.4@130.364,50.689 131.969,50.689 132.112,50.546 v1(132.207,50.546)
  Layer 2 w0.15: v1(125.959,45.923) 129.337,45.923 130.581,47.168 130.581,48.92 v1(132.207,50.546)
NetR11_1: R11.1 U1.21 | length 2.3
  Top Layer 1 w0.09: R11.1 124.282,49.149 124.822,49.689 U1.21@125.414,49.689
NetR12_2: R12.2 U1.20 | length 2.6
  Top Layer 1 w0.09: R12.2 122.747,50.429 123.027,50.149 125.032,50.149 125.081,50.198 U1.20
PGOOD: J2.2 U1.3 | length 21.9
  Top Layer 1 w0.09: U1.3@130.364,50.189 131.548,50.189 v1(132.207,49.53)
  Layer 2 w0.09: v1(132.207,49.53) 132.842,48.895 132.842,46.228 134.874,44.196 146.812,44.196 147.066,43.942 J2.2
V_OUT: C8.1 C9.1 C10.1 C11.1 L1.2 P2.1 R8.1 R13.2 | length 27.2
  Top Layer 1 w0.09: 142.545,45.72 142.673,45.592 142.747,45.592 v1@142.9,45.745
  Top Layer 1 w0.15: R13.2 128.321,43.496 128.321,43.078 128.727,42.672 138.709,42.672 141.249,45.212 142.621,45.212 v1(143.129,45.72) ; R8.1 134.341,47.015 v1(135.509,45.847)
  Layer 2 w0.15: v1(135.509,45.847) 135.572,45.783 143.065,45.783 v1(143.129,45.72)
  other v1: 148.844,52.578 149.606,53.086 148.844,53.594 148.844,55.372 149.606,55.88 148.844,56.388 148.59,61.976 148.59,62.992 148.59,64.008 148.59,65.532 148.59,66.548 148.59,67.564 148.59,68.834 148.59,69.85 148.59,70.866
VCC: C1.1 C2.1 C3.1 C4.1 C5.2 P1.2 U1.12 U1.13 U1.14 U1.15 U1.16 U1.17 U1.19 | length 15.7
  Top Layer 1 w0.09: U1.19@125.395,50.703 U1.19
  Top Layer 1 w0.2: v1(116.586,52.324) 116.586,53.949 C5.2 119.634,54.102 ; v1(124.079,50.698) U1.19 U1.19@125.395,50.703
  Layer 2 w0.2: v1(116.586,52.324) 116.586,51.638 118.44,49.784 123.166,49.784 124.079,50.697 v1(124.079,50.698)
VREG: C7.2 D1.C J1.8 R3.1 R4.1 R5.1 U1.18 | length 49.2
  Top Layer 1 w0.09: R3.1@111.01,66.802 R3.1 ; R4.1@111.01,69.342 R4.1 ; R5.1@111.01,71.882 R5.1 ; C7.2 121.779,52.122 C7.2@122.212,51.689 ; 124.991,51.241 125.003,51.229 125.094,51.229 U1.18
  Top Layer 1 w0.15: C7.2@122.212,51.689 v1(123.139,51.689) 123.927,51.689 124.375,51.241 124.991,51.241
  Top Layer 1 w0.2: v1(109.982,66.802) R3.1@111.01,66.802 ; v1(109.982,69.342) R4.1@111.01,69.342 ; v1(109.982,71.882) R5.1@111.01,71.882 ; D1.C 114.173,48.486 v1(114.173,50.241)
  Layer 5 w0.2: v1(109.982,66.802) v1(109.982,69.342) v1(109.982,71.882) 109.982,73.254 111.176,74.447 J1.8
  Bottom Layer 1 w0.15: v1(109.982,66.802) 108.864,65.684 108.864,56.337 113.894,51.308 ; v1(114.173,50.241) 114.173,51.029 113.894,51.308 ; v1(123.139,51.689) 122.758,51.308 113.894,51.308
pads on no net: J1.4

## Polygon pours and split planes (outlines as drawn)
V_OUT on Top Layer 1 "V_OUT_L01_P009" (solid, pour order 9): 148.158,44.729 151.765,44.729 152.986,45.951 152.986,82.569 145.142,82.569 145.136,82.575 144.932,82.372 144.932,61.722 147.396,61.722 148.315,60.803 148.315,57.358 147.93,56.972 144.729,56.972 144.729,51.968 147.726,51.968 148.209,51.486 148.209,47.879 148.158,47.828
V_OUT on Top Layer 1 "V_OUT_L01_P006" (solid, pour order 6): 148.158,47.828 147.828,47.498 142.24,47.498 142.24,44.729 148.158,44.729
VCC on Top Layer 1 "VCC_L01_P008" (solid, pour order 8): 125.825,76.842 124.413,78.254 124.413,81.276 123.825,81.864 120.04,81.864 119.431,81.255 119.431,53.492 122.555,53.492 122.809,53.238 122.809,52.375 123.038,52.146 123.825,52.146 124.413,51.558 125.743,51.558 125.825,51.64 125.825,53.726
GND on Top Layer 1 "GND_L01_P002" (solid, pour order 2): 126.263,48.946 126.263,77.114 124.917,78.461 124.917,81.686 125.755,82.525 144.577,82.525 144.577,61.697 132.842,61.697 129.515,58.369 129.515,48.946
NetC6_1 on Top Layer 1 "NETC6_1_L01_P003" (solid, pour order 3): 129.939,51.661 129.939,56.66 130.277,56.998 136.728,56.998 136.728,51.549 130.051,51.549 135.979,51.549 130.051,51.549
V_OUT on Layer 2 "V_OUT_L02_P010" (solid, pour order 10): 142.24,44.729 142.24,47.498 147.828,47.498 148.209,47.879 148.209,51.486 147.726,51.968 144.704,51.968 144.704,56.998 147.955,56.998 148.311,57.353 148.311,60.808 147.396,61.722 144.932,61.722 144.932,82.372 145.136,82.575 152.984,82.575 152.984,45.949 151.765,44.729
GND on Layer 3 (split plane): 152.982,38.458 108.156,38.458 108.156,84.122 152.982,84.122
GND on Layer 4 (split plane): 152.982,38.458 108.156,38.458 108.156,84.122 152.982,84.122

## Silkscreen, mask and mechanical layers (free items; w line width, h text height)
Top Overlay:
  text "20V" at 116.794,81.488 h1.5 r180
  text "5V" at 137.114,81.488 h1.5 r180
  text "250  300  400   500   600  750   850   970 kHz" at 108.445,75.211 h1.2 r270
  text "Buck regulator 5V 14A" at 108.966,40.973 h1
  text "EN  PG GND" at 143.456,40.094 h1.52
  text "design by M.L" at 122.07,39.466 h0.6